# EAGLE board word_clock (EAGLE 7.2.0)
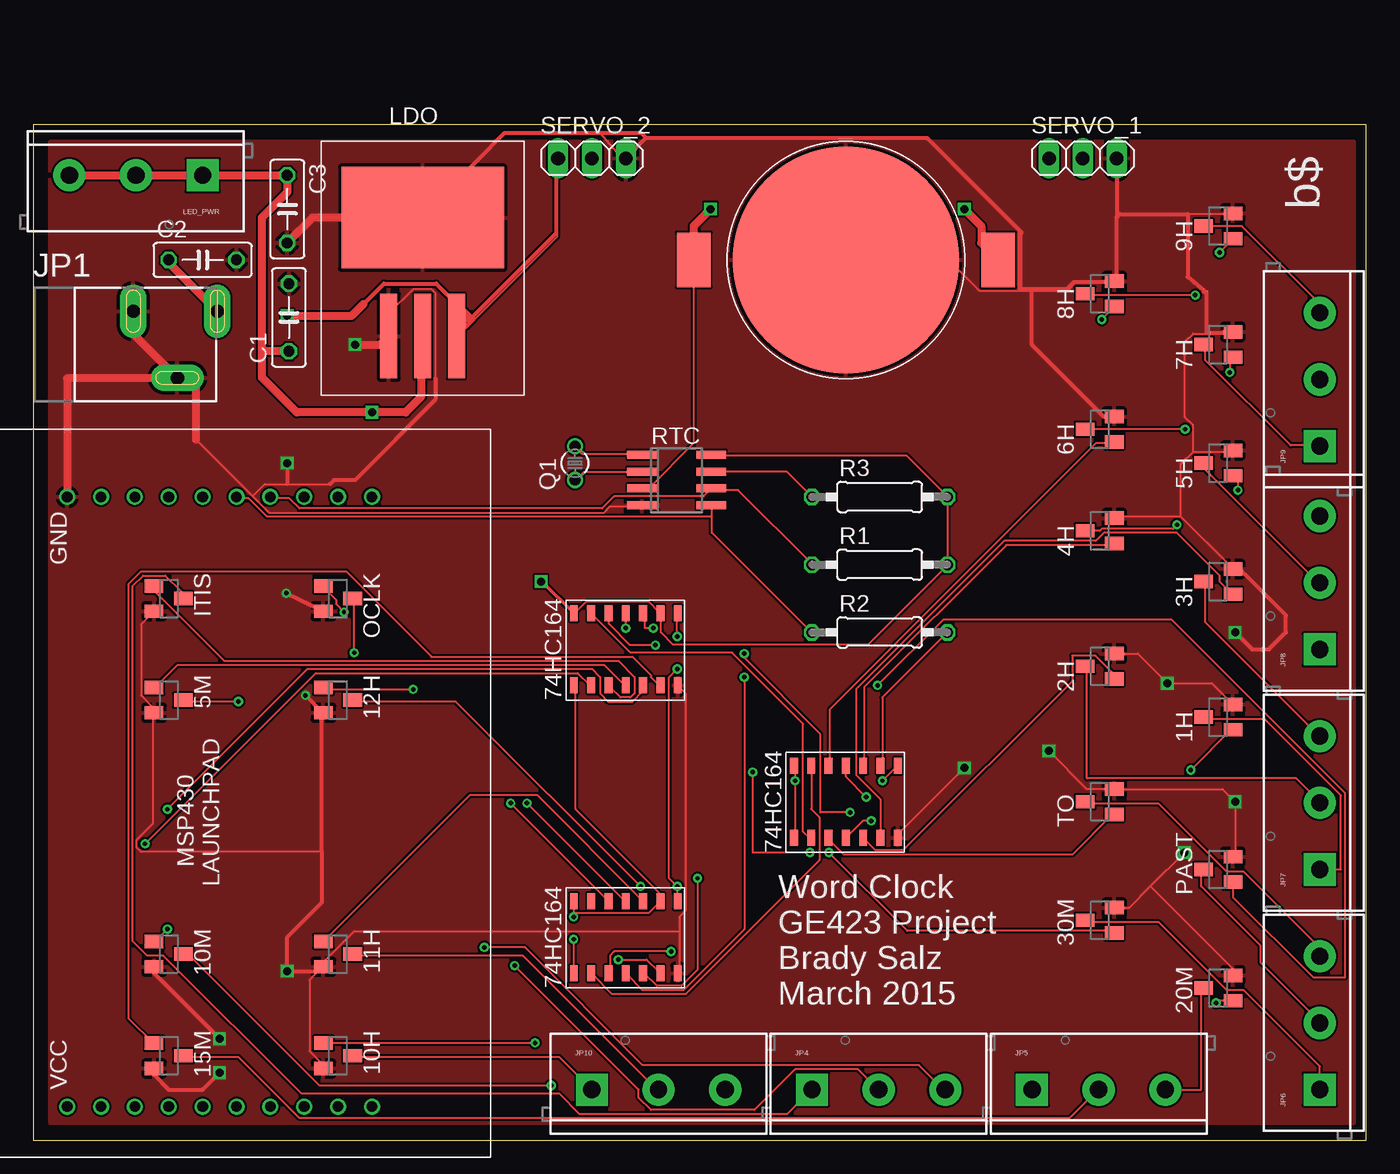
[diagram p0: board, top side]
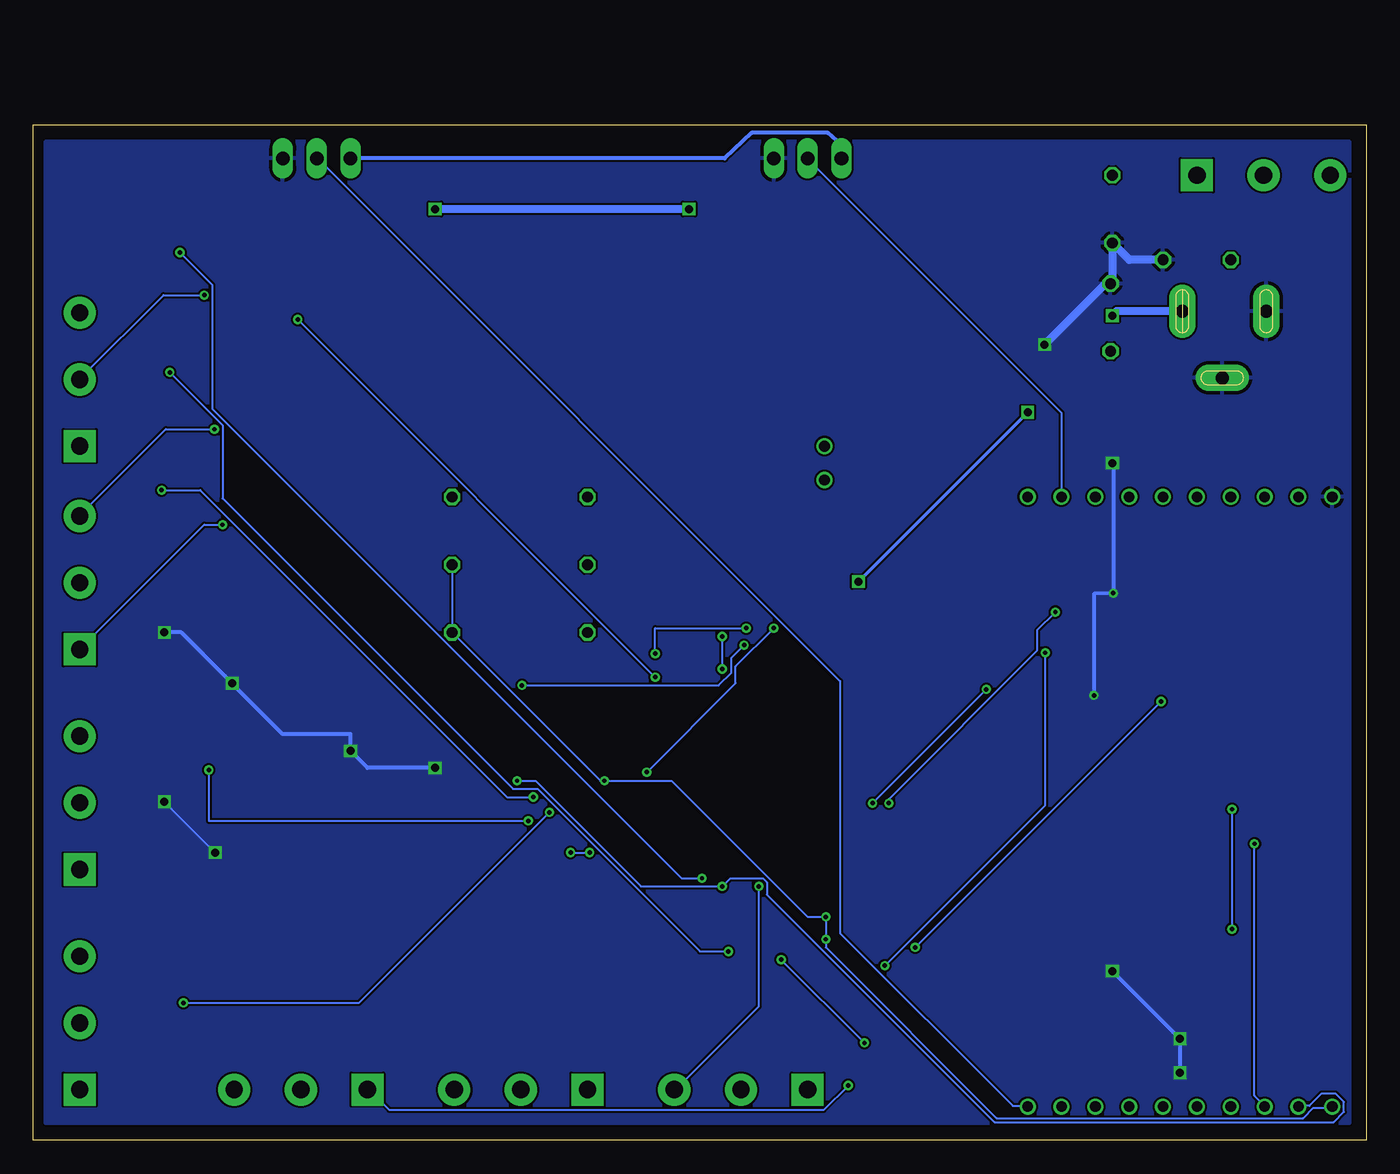
[diagram p1: board, bottom side, seen from below]

Size 100 x 76.19 mm. Coordinates in mm from the lower left corner, seen from the top.
Outline: 0,0 100,0 100,76.19 0,76.19 0,0
Copper layers (1*16): Top 0.0356mm / dielectric 1.5011mm / Bottom 0.0356mm
Design rules "oshpark": minimum track width 6mil, minimum drill 13mil, track to track 6mil, track to pad 6mil, pad to pad 6mil, via to via 6mil, smd to smd 6mil, copper to edge 15mil, drill to drill 6mil, minimum pad ring 7mil, minimum via ring 7mil, stop-mask expansion 3mil, vias tented up to drill 0mil, thermal gap 10mil

## Footprints (pad centres in the part's own frame; a part is rotated, then mirrored left to right if it is on the bottom)
SOT23 = smd 1 x 1.4: 1 -0.95,-1.1; 2 0.95,-1.1; 3 0,1.1
C050-025X075 = drill 0.813 octagon: 1 -2.54,0; 2 2.54,0
POWER_JACK_SLOT = drill 1 pad 2 long: GND@1 2.58,7.5; GND@2 7.58,10.8; PWR 2.58,13.8
SCREWTERMINAL-5MM-3 = drill 1.3 pad 2.413 square: 1 0,0 | drill 1.3 pad 2.413: 2 5,0; 3 10,0
TC26V = drill 0.813: 1 -1.27,0; 2 1.27,0
0207/10 = drill 0.813 octagon: 1 -5.08,0; 2 5.08,0
SOIC8 = smd 0.6 x 2.2: 1 -1.905,-2.6; 2 -0.635,-2.6; 3 0.635,-2.6; 4 1.905,-2.6; 5 1.905,2.6; 6 0.635,2.6; 7 -0.635,2.6; 8 -1.905,2.6
1X03 = drill 1.016 long: 1 -2.54,0; 2 0,0; 3 2.54,0
SHIFT_REGISTER = smd 1.18 x 0.58: P1 -2.7,3.9; P2 -2.7,2.6; P3 -2.7,1.3; P4 -2.7,0; P5 -2.7,-1.3; P6 -2.7,-2.6; P7 -2.7,-3.9; P8 2.7,-3.9; P9 2.7,-2.6; P10 2.7,-1.3; P11 2.7,0; P12 2.7,1.3; P13 2.7,2.6; P14 2.7,3.9
LDO = smd 1.27 x 6.35: P1 -2.54,-3.175; P2 0,-3.175; P3 2.54,-3.175 | smd 12.192 x 7.62: TAB 0,5.715
MSP430 = drill 0.8: 1 -22.86,22.86; 2 -22.86,20.32; 3 -22.86,17.78; 4 -22.86,15.24; 5 -22.86,12.7; 6 -22.86,10.16; 7 -22.86,7.62; 8 -22.86,5.08; 9 -22.86,2.54; 10 -22.86,0; 11 22.86,0; 12 22.86,2.54; 13 22.86,5.08; 14 22.86,7.62; 15 22.86,10.16; 16 22.86,12.7; 17 22.86,15.24; 18 22.86,17.78; 19 22.86,20.32; 20 22.86,22.86
COIN_CELL_SPARKFUN = smd 17 x 17: CENTER 0,0 | smd 2.54 x 4.08: SIDE_1 -11.41,0; SIDE_2 11.43,0

## Placement (x,y rotation side)
1H  FET  [SOT23]  88.9,31.75 90 top
2H  FET  [SOT23]  80.01,35.56 90 top
3H  FET  [SOT23]  88.9,41.91 90 top
4H  FET  [SOT23]  80.01,45.72 90 top
5H  FET  [SOT23]  88.9,50.8 90 top
5M  FET  [SOT23]  10.16,33.02 270 top
6H  FET  [SOT23]  80.01,53.34 90 top
7H  FET  [SOT23]  88.9,59.69 90 top
8H  FET  [SOT23]  80.01,63.5 90 top
9H  FET  [SOT23]  88.9,68.58 90 top
10H  FET  [SOT23]  22.86,6.35 270 top
10M  FET  [SOT23]  10.16,13.97 270 top
11H  FET  [SOT23]  22.86,13.97 270 top
12H  FET  [SOT23]  22.86,33.02 270 top
15M  FET  [SOT23]  10.16,6.35 270 top
20M  FET  [SOT23]  88.9,11.43 90 top
30M  FET  [SOT23]  80.01,16.51 90 top
C1  1u  [C050-025X075]  19.18,61.72 90 top
C2  4.7u  [C050-025X075]  12.7,66.04 0 top
C3  10u  [C050-025X075]  19.05,69.85 270 top
ITIS  FET  [SOT23]  10.16,40.64 270 top
JP1  POWER_JACKSLT  [POWER_JACK_SLOT]  0,64.77 270 top
JP4  [SCREWTERMINAL-5MM-3]  58.42,3.81 0 top
JP5  [SCREWTERMINAL-5MM-3]  74.93,3.81 0 top
JP6  [SCREWTERMINAL-5MM-3]  96.52,3.81 90 top
JP7  [SCREWTERMINAL-5MM-3]  96.52,20.32 90 top
JP8  [SCREWTERMINAL-5MM-3]  96.52,36.83 90 top
JP9  [SCREWTERMINAL-5MM-3]  96.52,52.07 90 top
JP10  [SCREWTERMINAL-5MM-3]  41.91,3.81 0 top
LED_PWR  [SCREWTERMINAL-5MM-3]  12.7,72.39 180 top
OCLK  FET  [SOT23]  22.86,40.64 270 top
PAST  FET  [SOT23]  88.9,20.32 90 top
Q1  32.768kHz  [TC26V]  40.64,50.8 90 top
R1  4.7k  [0207/10]  63.5,43.18 0 top
R2  4.7k  [0207/10]  63.5,38.1 0 top
R3  4.7k  [0207/10]  63.5,48.26 0 top
RTC  RTC  [SOIC8]  48.26,49.53 270 top
SERVO_1  [1X03]  78.74,73.66 0 top
SERVO_2  [1X03]  41.91,73.66 0 top
SR_1  SHIFT_REGISTER  [SHIFT_REGISTER]  44.45,36.83 90 top
SR_2  SHIFT_REGISTER  [SHIFT_REGISTER]  60.96,25.4 90 top
TO  FET  [SOT23]  80.01,25.4 90 top
U$1  SHIFT_REGISTER  [SHIFT_REGISTER]  44.45,15.24 90 top
U$4  LDO  [LDO]  29.21,63.5 0 top
U$25  MSP430  [MSP430]  25.4,25.4 90 top
U$28  COIN_CELL_SPARKFUN  [COIN_CELL_SPARKFUN]  60.96,66.04 0 top

## Library data of the parts
1H 2H 3H 4H 5H 5M 6H 7H 8H 9H 10H 10M 11H 12H 15M 20M 30M ITIS OCLK PAST RTC SR_1 SR_2 TO U$1 U$4 U$25 = word_clock
C1-C3 R1-R3 = rcl
JP1 = SparkFun-Connectors; PROD_ID: PRT-00119
JP4-JP10 LED_PWR = SparkFun-Connectors; STOREFRONT_ID: PRT-08433
Q1 = crystal; OC_FARNELL: unknown; OC_NEWARK: unknown
SERVO_1 SERVO_2 = pinhead
U$28 = eoh

## Nets
3.3V: C1.1 C3.1 LED_PWR.1 LED_PWR.2 LED_PWR.3 R1.2 R2.2 R3.2 RTC.8 SR_1.P1 SR_1.P9 SR_1.P14 SR_2.P1 SR_2.P9 SR_2.P14 U$1.P1 U$1.P9 U$1.P14 U$4.P2 U$25.1
EIGHT: 8H.1 U$1.P4
EIGHT_LED: 8H.3 JP9.2
ELEVEN: 11H.1 U$1.P10
ELEVEN_LED: 11H.3 JP10.2
FIVE_HR: 5H.1 SR_2.P11
FIVE_HR_LED: 5H.3 JP8.2
FIVE_MIN: 5M.1 SR_1.P4
FIVE_MIN_LED: 5M.3 JP4.3
FOUR: 4H.1 SR_2.P10
FOUR_LED: 4H.3 JP8.1
GND: 1H.2 2H.2 3H.2 4H.2 5H.2 5M.2 6H.2 7H.2 8H.2 9H.2 10H.2 10M.2 11H.2 12H.2 15M.2 20M.2 30M.2 C1.2 C2.2 C3.2 ITIS.2 JP1.GND@1 JP1.GND@2 OCLK.2 PAST.2 RTC.4 SERVO_1.3 SERVO_2.3 SR_1.P7 SR_2.P7 TO.2 U$1.P7 U$4.P1 U$4.TAB U$25.20 U$28.CENTER
HALF: 30M.1 SR_1.P11
HALF_LED: 30M.3 JP6.1
IRQ: R3.1 RTC.7
IT_IS: ITIS.1 SR_1.P3
IT_IS_LED: ITIS.3 JP4.1
N$1: Q1.1 RTC.2
N$2: Q1.2 RTC.1
N$4: SR_1.P13 SR_2.P2
N$5: SR_2.P13 U$1.P2
N$7: U$1.P13
NINE: 9H.1 U$1.P5
NINE_LED: 9H.3 JP9.3
OCLK: OCLK.1 U$1.P12
OCLK_LED: JP4.2 OCLK.3
ONE: 1H.1 SR_2.P4
ONE_LED: 1H.3 JP7.1
PAST: PAST.1 SR_1.P12
PAST_LED: JP6.2 PAST.3
QUARTER: 15M.1 SR_1.P6
QUARTER_LED: 15M.3 JP5.2
RTC_SCL: R1.1 RTC.6 U$25.14
RTC_SDA: R2.1 RTC.5 U$25.15
SERVO_1: SERVO_1.2 U$25.10
SERVO_2: SERVO_2.2 U$25.12
SEVEN: 7H.1 U$1.P3
SEVEN_LED: 7H.3 JP9.1
SIX: 6H.1 SR_2.P12
SIX_LED: 6H.3 JP8.3
SR_CLK: SR_1.P8 SR_2.P8 U$1.P8 U$25.2
SR_DATA: SR_1.P2 U$25.3
TEN_HR: 10H.1 U$1.P6
TEN_HR_LED: 10H.3 JP10.1
TEN_MIN: 10M.1 SR_1.P5
TEN_MIN_LED: 10M.3 JP5.1
THREE: 3H.1 SR_2.P6
THREE_LED: 3H.3 JP7.3
TO: SR_2.P3 TO.1
TO_LED: JP6.3 TO.3
TWELVE: 12H.1 U$1.P11
TWELVE_LED: 12H.3 JP10.3
TWENTY: 20M.1 SR_1.P10
TWENTY_LED: 20M.3 JP5.3
TWO: 2H.1 SR_2.P5
TWO_LED: 2H.3 JP7.2
VBACK: RTC.3 U$28.SIDE_1 U$28.SIDE_2
VCC_5: C2.1 JP1.PWR SERVO_1.1 SERVO_2.1 U$4.P3

## Tracks (layer width: path | path; a pad name or v marks a point on that pad's centre or on a via)
3.3V  (via drill 0.33, 0.6)
  Top 0.152: SR_1.P1 40.69,33.98 40.69,24.84 46.94,18.59 46.94,17.98 U$1.P9 46.94,17.83 46.18,17.07 40.54,17.07 | v40.54,15.09 40.54,12.65 U$1.P1 | 40.54,17.07 40.54,17.83 U$1.P14 | 40.54,17.07 v40.54,16.76 | 29.11,58.52 29.11,60.2 U$4.P2 | SR_2.P1 57.15,22.71 v57.15,26.98 57.15,28.04 SR_2.P14 | R2.2 63.7,33.22 63.7,28.19 SR_2.P9 | SR_1.P14 40.69,39.62 41.45,40.39 46.18,40.39 46.94,39.62 SR_1.P9 47.09,39.47 47.09,38.1 48.01,37.19 62.64,37.19 68.58,43.13 R1.2 R3.2 68.58,48.31 65.53,51.36 50.9,51.36 RTC.8
  Top 0.254: v38.1,41.91 38.17,41.91 SR_1.P14
  Top 0.61: 17.14,59.18 17.14,69.22 19.05,71.12 C3.1 LED_PWR.1 LED_PWR.2 LED_PWR.3 | 17.14,59.18 17.14,57.23 19.76,54.61 v25.4,54.61 27.94,54.61 29.11,55.78 29.11,58.52 | C1.1 17.14,59.18
  Bottom 0.152: U$25.1 2.59,2.44 3.96,2.44 4.72,1.68 27.74,1.68 40.54,14.48 v40.54,15.09 v40.54,16.76 41.91,16.76 52.12,26.98 v57.15,26.98 57.45,26.98 R2.2 R1.2
  Bottom 0.254: v25.4,54.61 v38.1,41.91
EIGHT  (via drill 0.33)
  Top 0.152: v53.34,34.75 53.34,15.85 48.77,11.28 45.72,11.28 44.5,12.5 U$1.P4 | v80.16,61.57 81.08,62.48 8H.1
  Bottom 0.152: v80.16,61.57 v53.34,34.75
EIGHT_LED  (via drill 0.33)
  Top 0.152: v87.17,63.4 78.94,63.4 8H.3
  Bottom 0.152: v87.17,63.4 90.22,63.4 96.47,57.15 JP9.2
ELEVEN
  Top 0.152: U$1.P10 45.72,17.98 37.8,25.91 32.77,25.91 21.79,14.94 11H.1
ELEVEN_LED
  Top 0.152: 11H.3 24.08,13.87 36.73,13.87 46.79,3.81 JP10.2
FIVE_HR  (via drill 0.33)
  Top 0.152: SR_2.P11 60.96,27.28 v62.48,25.76 | v90.37,48.77 90.37,49.53 90.07,49.84 5H.1
  Bottom 0.152: v62.48,25.76 64.47,25.76 87.48,48.77 v90.37,48.77
FIVE_HR_LED
  Top 0.152: 5H.3 87.94,50.75 87.94,50.29 96.47,41.76 JP8.2
FIVE_MIN
  Top 0.152: SR_1.P4 44.35,34.14 42.82,35.66 10.82,35.66 9.14,33.98 5M.1
FIVE_MIN_LED  (via drill 0.33)
  Top 0.152: v15.39,32.92 11.28,32.92 5M.3 | v33.83,14.48 36.88,14.48 45.72,5.64 66.45,5.64 68.28,3.81 JP4.3
  Bottom 0.152: v33.83,14.48 v15.39,32.92
FOUR
  Top 0.152: SR_2.P10 62.33,28.19 62.33,33.98 73,44.65 81.08,44.65 4H.1
FOUR_LED  (via drill 0.33)
  Top 0.152: 4H.3 80.01,45.72 80.16,45.87 85.5,45.87 v85.8,46.18
  Bottom 0.152: v85.8,46.18 87.17,46.18 JP8.1
GND  (via drill 0.33, 0.6)
  Top 0.152: 81.23,69.49 81.23,73.61 SERVO_1.3 | 81.23,69.49 81.23,64.47 8H.2 81.08,64.31 78.18,64.31 77.57,63.7 74.93,63.7 73.91,63.7 | 81.23,69.49 86.87,69.49 | 86.87,69.49 89.92,69.49 9H.2 | 86.11,46.79 81.23,46.79 4H.2 | 86.11,46.79 89.92,42.98 3H.2 90.49,42.86 93.98,39.37 | 87.02,51.66 89.92,51.66 5H.2 | 87.02,51.66 86.11,50.75 86.11,46.79 | 87.02,51.66 87.02,53.65 86.41,54.25 86.41,59.89 87.02,60.5 89.92,60.5 7H.2 | 81.23,54.25 6H.2 | 86.61,69.47 86.87,69.49 | 87.78,63.7 86.87,64.62 | 73.91,63.7 71.02,63.7 68.73,65.99 60.96,65.99 U$28.CENTER | 48.46,15.7 48.46,16.76 48.92,17.22 48.92,33.53 48.46,33.98 SR_1.P7 | 48.46,15.7 48.46,12.65 U$1.P7 | ITIS.2 8.99,39.62 8.08,38.71 8.08,33.38 8.99,32.46 8.99,32.16 5M.2 8.99,32 8.99,23.77 7.77,22.55 7.77,21.95 8.08,21.64 21.64,21.64 | 10H.2 21.64,5.49 21.64,5.79 20.73,6.71 20.73,12.04 21.64,12.95 11H.2 | 21.64,32 12H.2 21.64,32.16 | 21.64,13.11 11H.2 | 48.46,15.7 24.08,15.7 21.79,13.41 21.79,13.11 11H.2 | 42.49,75.56 44.04,73.76 44.35,73.76 SERVO_2.3 44.5,73.76 45.87,75.13 67.06,75.13 73.91,68.28 73.91,63.7 | 29.26,69.34 U$4.TAB | 21.64,39.78 OCLK.2 | 12.19,52.58 16.46,48.31 | 16.46,48.31 17.68,47.09 42.82,47.09 43.28,47.55 45.57,47.55 RTC.4 | U$4.P1 26.67,62.03 28.5,63.86 29.87,63.86 30.18,63.55 30.18,57.15 | 22.25,49.23 19.05,49.23 17.37,49.23 16.46,48.31 | 30M.2 82.23,17.46 83.82,19.05 | 83.82,19.05 v86.36,21.59 | PAST.2 90.17,21.44 v90.17,25.4 89.22,26.35 TO.2 79.06,26.35 v76.2,29.21 | 1H.2 88.41,34.29 v85.09,34.29 82.87,36.51 2H.2 | SR_2.P7 64.86,22.95 v69.85,27.94 | 20M.2 90,12.87 83.82,19.05
  Top 0.254: JP1.GND@2 11.39,57.19 11.43,57.15
  Top 0.305: 21.64,32 21.64,21.64 21.64,17.83 19.05,15.24 v19.05,12.7 21.44,12.7 11H.2 | 29.26,69.34 35.36,75.56 42.49,75.56 45.59,75.56 45.97,75.18 | v18.97,41.05 21.64,39.78 | v20.42,33.38 21.64,32.16 | 45.97,75.18 67.06,75.18 74.17,68.07 74.04,68.07 74.04,63.88 77.6,63.88 78.11,64.39 80.52,64.39 | SERVO_1.3 81.28,69.22 | 81.28,64.52 81.28,69.22 | 81.28,69.22 81.53,69.47 86.61,69.47 86.61,64.77 88.01,63.63 | 88.01,63.63 88.01,60.58 89.28,60.58 89.36,60.5 89.92,60.5 | SERVO_2.3 45.97,75.18 | v90.17,38.1 91.44,36.83 92.71,36.83 93.98,38.1 93.98,39.37 90.17,43.18 | 89.92,43.18 89.92,42.8 89.98,42.86 3H.2 | 30.18,57.15 30.18,55.58 24.13,49.53 22.55,49.53 22.25,49.23 | v19.05,50.8 19.05,49.23 | 81.23,54.25 80.37,54.25 74.93,59.69 74.93,63.7 | 88.01,63.63 87.86,63.63 87.78,63.7 | 15M.2 9.06,4.91 10.16,3.81 12.7,3.81 v13.97,5.08 | 10M.2 9.06,12.53 v13.97,7.62
  Top 0.61: v24.13,59.69 26.04,59.69 U$4.P1 | JP1.GND@1 7.5,60.49 JP1.GND@2 12.15,57.19 12.19,57.15 12.19,52.58 | 11.43,57.15 2.54,57.15 U$25.20 | U$4.TAB 20.95,69.22 C3.2
  Bottom 0.152: v86.36,21.59 v90.17,25.4 | 88.9,38.1 v85.09,34.29 81.28,30.48
  Bottom 0.305: v20.42,33.38 20.42,41 v18.97,41.05 18.97,50.72 v19.05,50.8 | v69.85,27.94 74.93,27.94 v76.2,29.21 76.2,30.48 81.28,30.48 88.9,38.1 v90.17,38.1 | v19.05,12.7 v13.97,7.62 v13.97,5.08
  Bottom 0.61: C2.2 17.78,66.04 C3.2 19.05,64.39 C1.2 19.56,64.26 v24.13,59.69
  pour Top: 1.27,2.54 1.27,74.93 99.06,74.93 99.06,1.27 1.27,1.27
  pour Bottom: 1.27,1.27 99.06,1.27 99.06,74.93 1.27,74.93
HALF  (via drill 0.33)
  Top 0.152: v44.45,38.42 SR_1.P11 | v53.98,27.62 53.98,21.59 v58.26,21.59 | v59.69,21.59 65.56,15.72 80.96,15.72 30M.1
  Bottom 0.152: v44.45,38.42 47.31,35.56 47.31,34.29 v53.98,27.62 | v59.69,21.59 v58.26,21.59
HALF_LED
  Top 0.152: JP6.1 96.52,5.56 90.81,11.27 89.53,11.27 84.45,16.35 79.22,16.35 79.06,16.51 30M.3
IRQ
  Top 0.152: R3.1 56.54,50.14 50.9,50.14 RTC.7
IT_IS
  Top 0.152: SR_1.P3 43.28,33.98 44.04,33.22 44.81,33.22 45.11,33.53 45.11,34.75 43.89,35.97 14.33,35.97 9.14,41.15 9.14,41.45 ITIS.1
IT_IS_LED
  Top 0.152: ITIS.3 11.12,40.69 11.12,41.15 9.91,42.37 8.23,42.37 7.47,41.6 7.47,14.94 8.53,13.87 9.75,13.87 20.12,3.5 39.47,3.5 41,1.98 56.54,1.98 58.37,3.81 JP4.1
N$1
  Top 0.152: RTC.2 45.57,50.14 41.3,50.14 40.69,49.53 Q1.1
N$2
  Top 0.152: RTC.1 45.57,51.51 41.15,51.51 40.69,51.97 Q1.2
N$4
  Top 0.152: SR_1.P13 41.91,39.47 44.81,36.58 52.43,36.58 57.76,31.24 57.76,23.16 58.22,22.71 SR_2.P2
N$5
  Top 0.152: U$1.P2 41.91,12.5 43.43,10.97 48.92,10.97 58.98,21.03 58.98,24.23 58.37,24.84 58.37,28.04 SR_2.P13
NINE  (via drill 0.33)
  Top 0.152: v49.84,19.66 49.84,12.8 48.62,11.58 46.79,11.58 45.87,12.5 U$1.P5 | v89,66.6 89.92,67.51 9H.1
  Bottom 0.152: v49.84,19.66 51.36,19.66 86.56,54.86 86.56,64.16 v89,66.6
NINE_LED
  Top 0.152: 9H.3 90.68,68.58 96.47,62.79 96.47,62.18 JP9.3
OCLK  (via drill 0.33)
  Top 0.152: v35.81,25.3 43.13,17.98 U$1.P12 | v23.32,39.62 22.71,40.23 22.71,40.54 21.79,41.45 OCLK.1
  Bottom 0.152: v35.81,25.3 35.81,25.6 24.69,36.73 24.69,38.25 v23.32,39.62
OCLK_LED  (via drill 0.33)
  Top 0.152: v24.08,36.58 24.08,40.54 OCLK.3 | v36.12,13.11 45.41,3.81 45.41,3.2 46.33,2.29 54.1,2.29 57.15,5.33 61.87,5.33 63.4,3.81 JP4.2
  Bottom 0.152: v24.08,36.58 24.08,25.15 v36.12,13.11
ONE  (via drill 0.33)
  Top 0.152: v62.87,23.97 62.23,23.97 SR_2.P4 | v86.84,27.78 89.85,30.8 1H.1
  Bottom 0.152: v62.87,23.97 86.84,23.97 v86.84,27.78
ONE_LED
  Top 0.152: JP7.1 98.11,20.32 98.11,25.88 92.39,31.59 88.11,31.59 87.95,31.75 1H.3
PAST  (via drill 0.33)
  Top 0.152: v46.67,37.15 44.77,37.15 43.18,38.73 43.18,39.53 SR_1.P12 | v63.34,34.13 68.26,39.05 85.41,39.05 98.42,26.04 98.42,12.22 96.04,12.22 90.01,18.26 PAST.1
  Bottom 0.152: v46.67,37.15 47.62,36.2 47.62,35.08 48.58,34.13 v63.34,34.13
PAST_LED
  Top 0.152: 87.95,20.32 PAST.3 87.63,20.15 87.63,19.05 92.08,14.61 92.08,13.34 96.52,8.89 JP6.2
QUARTER
  Top 0.152: SR_1.P6 46.94,34.14 46.33,34.75 46.33,34.9 44.96,36.27 29.87,36.27 23.47,42.67 8.08,42.67 7.16,41.76 7.16,9.14 8.99,7.32 15M.1
QUARTER_LED
  Top 0.152: 15M.3 11.28,6.25 15.39,6.25 19.96,1.68 77.72,1.68 79.86,3.81 JP5.2
RTC_SCL
  Top 0.152: R1.1 58.37,43.28 52.88,48.77 50.9,48.77 RTC.6 50.75,48.77 50.29,48.31 43.59,48.31 42.67,47.4 19.96,47.4 19.2,48.16 17.83,48.16 U$25.14
RTC_SDA
  Top 0.152: 50.9,46.79 50.9,45.57 58.37,38.1 R2.1 | 50.9,46.79 50.9,47.55 RTC.5 | 50.9,46.79 17.53,46.79 16.15,48.16 15.24,48.16 U$25.15
SERVO_1
  Bottom 0.152: U$25.10 25.45,2.59 26.52,2.59 39.47,15.54 39.47,34.44 78.64,73.61 SERVO_1.2
SERVO_2
  Bottom 0.152: U$25.12 22.86,54.56 41.91,73.61 SERVO_2.2
SEVEN  (via drill 0.33)
  Top 0.152: v47.85,14.17 43.59,14.17 43.28,13.87 43.28,12.65 U$1.P3 | v89.76,57.61 89.76,58.52 89.92,58.67 7H.1
  Bottom 0.152: v47.85,14.17 49.99,14.17 62.18,26.36 64.01,26.36 85.8,48.16 85.8,53.65 v89.76,57.61
SEVEN_LED
  Top 0.152: 7H.3 87.94,59.59 87.94,58.52 94.34,52.12 96.47,52.12 JP9.1
SIX
  Top 0.152: SR_2.P12 59.74,28.19 59.74,32.31 79.7,52.27 81.08,52.27 6H.1
SIX_LED  (via drill 0.33)
  Top 0.152: v86.41,53.34 6H.3
  Bottom 0.152: v86.41,53.34 90.07,53.34 96.47,46.94 JP8.3
SR_CLK  (via drill 0.33)
  Top 0.152: v63.7,26.98 64.77,28.04 SR_2.P8 | U$1.P8 48.31,17.98 v48.31,19.05 47.7,19.66 47.7,34.75 v48.31,35.36 | v48.31,37.8 48.31,39.47 SR_1.P8
  Bottom 0.152: v63.7,26.98 62.33,26.98 54.41,19.05 v48.31,19.05 47.7,19.66 45.26,19.66 44.96,19.36 44.96,18.44 27.89,1.37 2.44,1.37 1.68,2.13 1.68,2.9 2.29,3.5 3.35,3.5 4.27,2.59 5.03,2.59 U$25.2 | v48.31,35.36 v48.31,37.8
SR_DATA  (via drill 0.33)
  Top 0.152: v8.38,22.25 21.18,35.05 40.84,35.05 41.76,34.14 SR_1.P2
  Bottom 0.152: v8.38,22.25 8.38,3.35 7.62,2.59 U$25.3
TEN_HR  (via drill 0.33)
  Top 0.152: v43.89,13.56 46.02,13.56 46.94,12.65 U$1.P6 | v37.64,7.32 21.79,7.32 10H.1
  Bottom 0.152: v37.64,7.32 v43.89,13.56
TEN_HR_LED
  Top 0.152: JP10.1 39.47,6.25 24.08,6.25 10H.3
TEN_MIN  (via drill 0.33)
  Top 0.152: v10.06,24.84 20.57,35.36 41.91,35.36 42.52,34.75 42.52,33.53 43.13,32.92 44.96,32.92 45.72,33.68 45.72,33.98 SR_1.P5 | v10.06,15.85 9.14,14.94 10M.1
  Bottom 0.152: v10.06,15.85 v10.06,24.84
TEN_MIN_LED  (via drill 0.33)
  Top 0.152: v38.86,4.12 21.49,4.12 11.73,13.87 11.28,13.87 10M.3
  Bottom 0.152: v38.86,4.12 40.69,2.29 73.3,2.29 74.83,3.81 JP5.1
THREE
  Top 0.152: SR_2.P6 63.55,25.6 61.72,27.43 61.72,33.83 72.85,44.96 79.7,44.96 80.31,45.57 85.8,45.57 89,42.37 89,41.91 89.92,41 3H.1
THREE_LED
  Top 0.152: 3H.3 87.94,41.91 87.94,38.86 96.47,30.33 JP7.3
TO
  Top 0.152: SR_2.P3 59.69,22.54 60.8,21.43 77.95,21.43 80.96,24.45 TO.1
TO_LED
  Top 0.152: JP6.3 96.52,14.45 90.81,20.16 89.53,20.16 84.45,25.24 79.22,25.24 79.06,25.4 TO.3
TWELVE  (via drill 0.33)
  Top 0.152: v37.03,25.3 44.35,17.98 U$1.P11 | v28.5,33.83 21.79,33.83 12H.1
  Bottom 0.152: v28.5,33.83 v37.03,25.3
TWELVE_LED  (via drill 0.33)
  Top 0.152: v45.57,19.05 31.7,32.92 24.08,32.92 12H.3
  Bottom 0.152: v45.57,19.05 45.57,10.06 51.82,3.81 JP10.3
TWENTY  (via drill 0.33)
  Top 0.152: v46.51,38.42 45.88,38.42 45.88,39.53 SR_1.P10 | v53.34,36.51 53.34,36.2 59.05,30.48 59.05,24.61 v61.28,24.61 | v88.74,10.32 88.9,10.48 89.85,10.48 20M.1
  Bottom 0.152: v46.51,38.42 53.34,38.42 v53.34,36.51 | v61.28,24.61 75.56,10.32 v88.74,10.32
TWENTY_LED
  Top 0.152: JP5.3 87.63,3.81 87.63,11.43 20M.3
TWO
  Top 0.152: SR_2.P5 62.39,22.54 63.18,21.75 65.25,21.75 77.95,34.45 77.95,36.35 79.69,36.35 80.96,35.08 80.96,34.77 2H.1
TWO_LED
  Top 0.152: 2H.3 79.06,35.56 79.06,27.15 94.77,27.15 96.52,25.4 JP7.2
VBACK  (via drill 0.6)
  Top 0.152: RTC.3 45.72,48.92 46.18,48.92 49.53,52.27 49.53,65.99 U$28.SIDE_1
  Top 0.61: U$28.SIDE_1 49.55,68.6 v50.8,69.85 | v69.85,69.85 71.12,68.58 71.12,67.31 U$28.SIDE_2
  Bottom 0.61: v50.8,69.85 v69.85,69.85
VCC_5  (via drill 0.6)
  Top 0.152: 32.92,61.42 31.85,60.35 U$4.P3 | 32.92,61.42 39.32,67.82 39.32,73.61 SERVO_2.1 | 24.54,62.33 26.36,64.16 30.18,64.16 32.92,61.42
  Top 0.254: 39.24,73.66 SERVO_2.1
  Top 0.305: 24.26,62.23 24.77,62.74 26.29,64.26 30.23,64.26 31.24,63.25 31.37,63.25 33.02,61.59 32.38,60.96 32.38,61.59 32.51,61.72 32.51,61.59 32.64,61.47 39.24,68.07 39.24,73.66
  Top 0.61: C2.1 10.16,65.83 JP1.PWR | v19.05,61.85 23.88,61.85 24.77,62.74
  Bottom 0.152: 76.2,73.76 SERVO_1.1
  Bottom 0.305: 75.95,73.91 SERVO_1.1 48.13,73.66 46.1,75.56 40.39,75.56 39.37,74.68 SERVO_2.1
  Bottom 0.61: JP1.PWR 18.71,62.19 v19.05,61.85

## Text on the board
tPlace: b$ | Word Clock / GE423 Project / Brady Salz / March 2015